# Altium PCB BOOSTController.PcbDoc
Units mm, origin at the board's own origin, x right, y up, seen from the top; angles counter-clockwise.
Board outline 82.81 x 63.42 mm, 2 copper layers (Top Layer, Bottom Layer); 18 components, 15 nets, 85 pads, 2 vias.
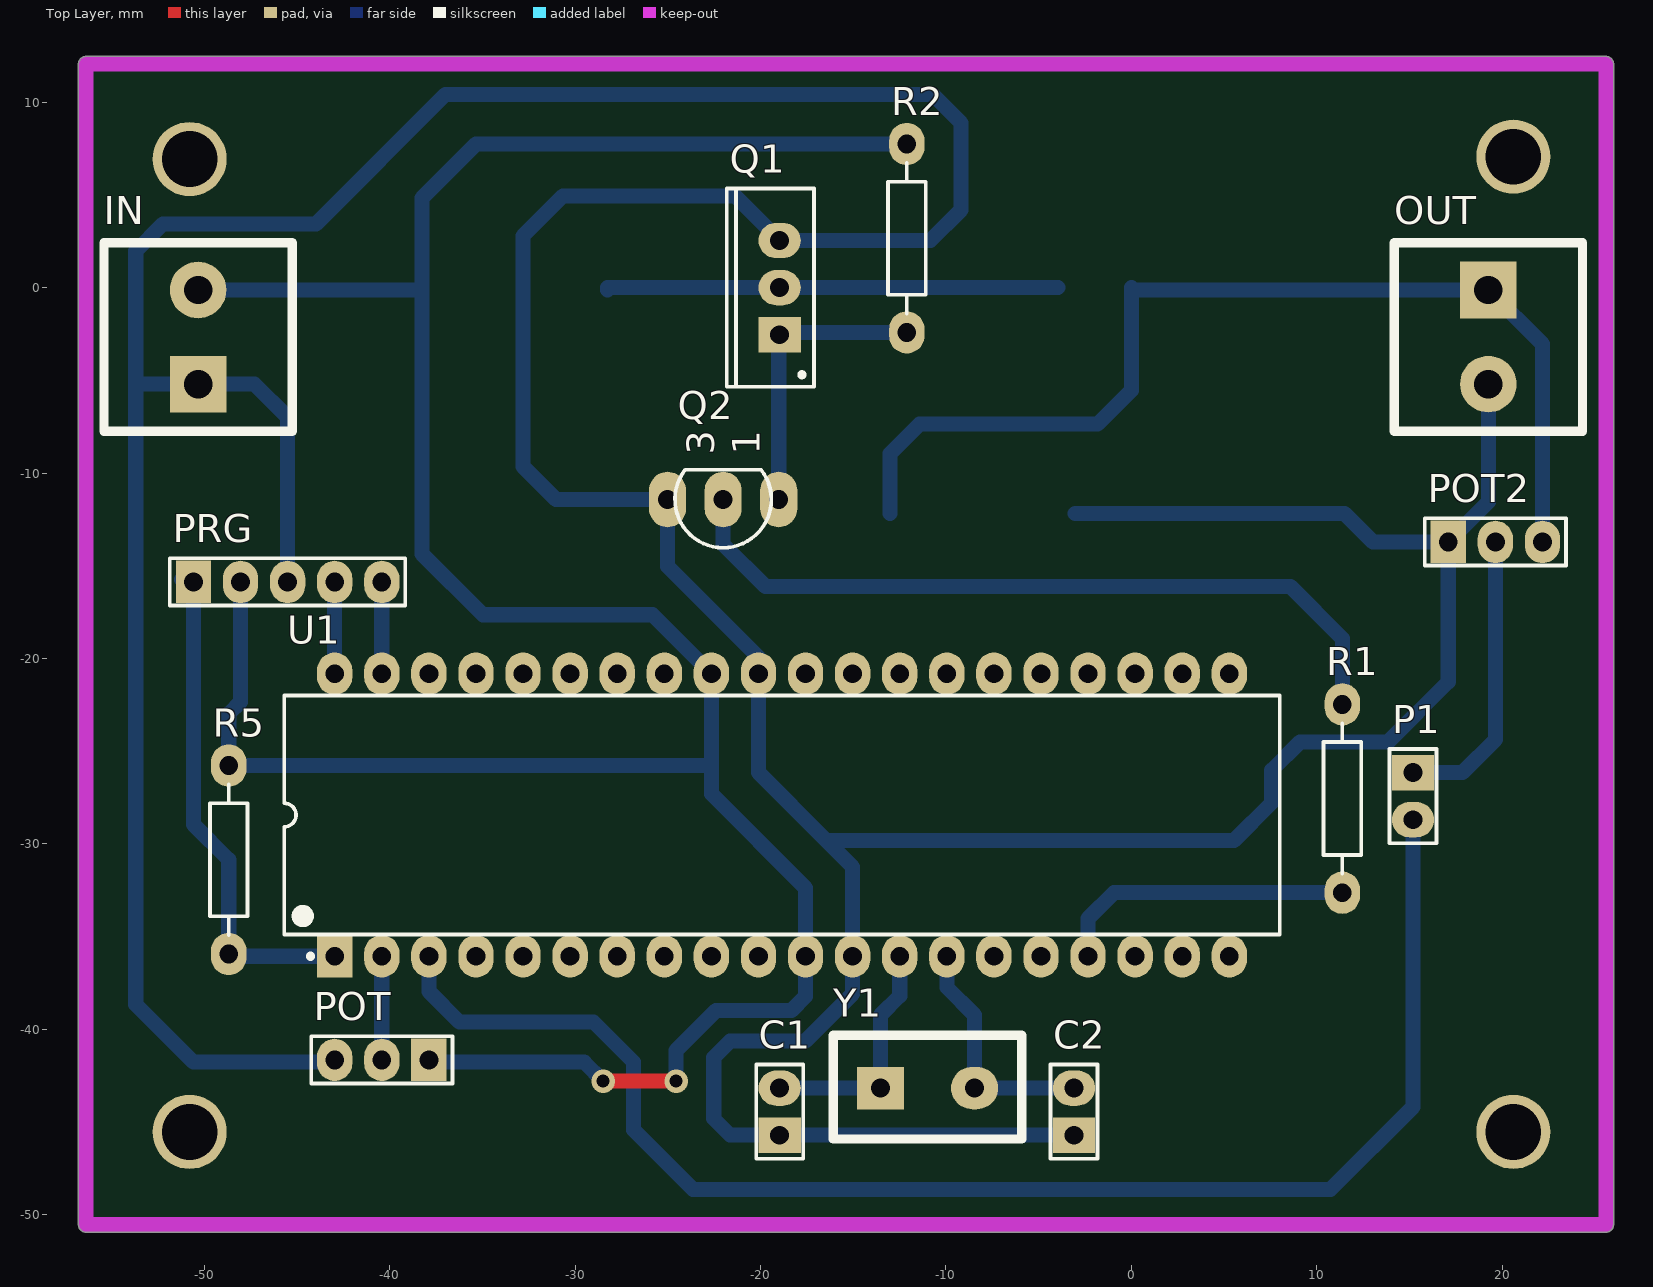
[diagram p0: Top Layer view]
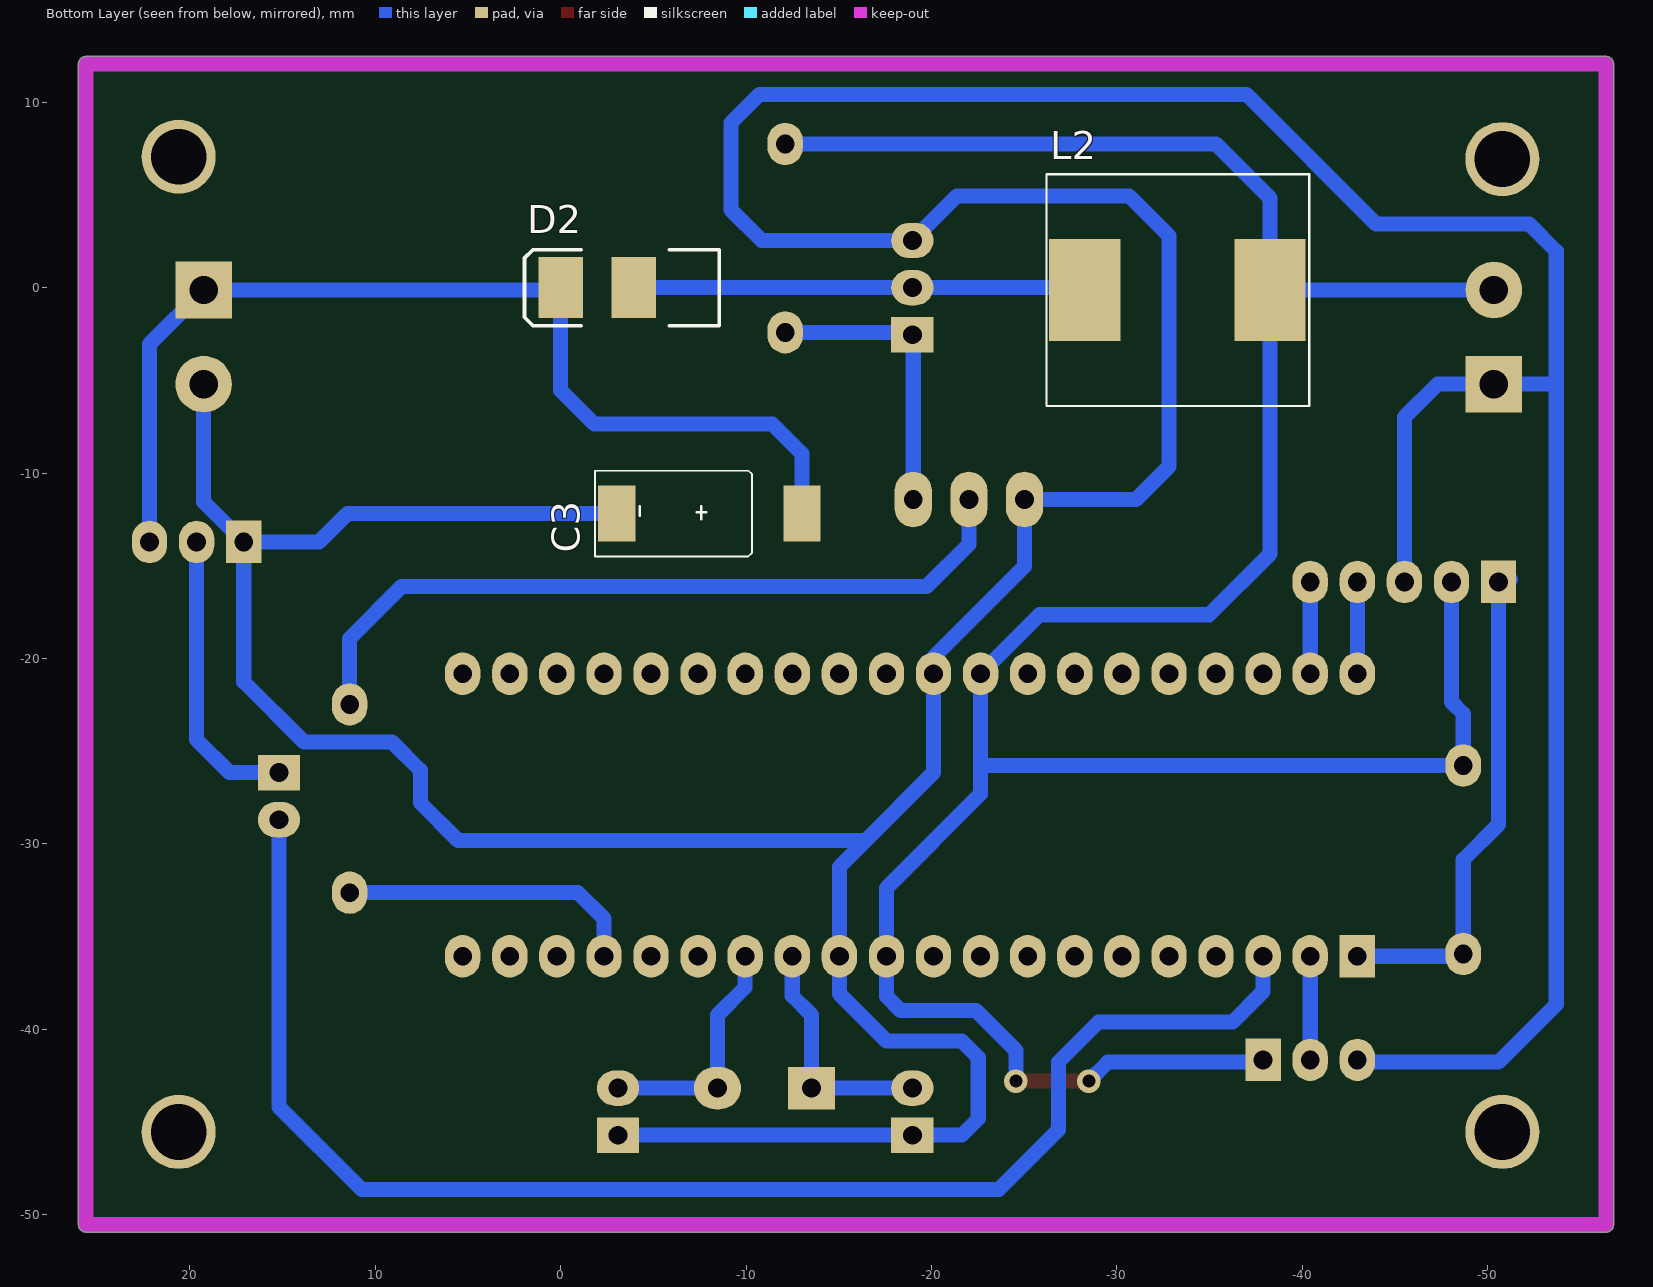
[diagram p1: Bottom Layer view, seen from below]

## Layer stack, top to bottom
Top Solder: solder mask 0.0102, Solder Resist, Dk 3.5
Top Layer: signal copper 0.0356
Dielectric 1: dielectric 0.32, FR-4, Dk 4.8
Bottom Layer: signal copper 0.0356
Bottom Solder: solder mask 0.0102, Solder Resist, Dk 3.5

## Board outline
-56.388,-50.953 cw(c-56.388,-50.546) -56.795,-50.546 -56.795,12.065 cw(c-56.388,12.065) -56.388,12.472 25.608,12.472 cw(c25.608,12.065) 26.015,12.065 26.015,-50.546 cw(c25.608,-50.546) 25.608,-50.953

## Design rules (kind name [scope] priority, off if disabled: settings)
Clearance [All] p1: gap=0.254
PolygonConnect [All] p1: connectstyle=Relief reliefconductorwidth=0.254 reliefentries=4 polygonreliefangle="90 Angle" airgapwidth=0.254
RoutingVias [All] p1: holewidth=0.711 width=1.27 viastyle="Through Hole" minholewidth=0.711 minwidth=1.27 maxholewidth=0.711 maxwidth=1.27
SolderMaskExpansion [All] p1: expansion=0.102
Width [All] p1: maxlimit=1.016 minlimit=0.813 preferedwidth=0.813 minimp=50.000000 maximp=50.000000 favimp=50.000000
30 further rules are at their usual default settings.

## Components (designator, comment, footprint, x,y, rotation, side; value= is the part's Value field where it differs from the comment)
C1 "Cap" RAD-0.1 -18.969,-44.45 r90 top
C2 "Cap" RAD-0.1 -3.094,-44.45 r90 top
C3 "" SMC7343P -6.015,-12.192 r0 bottom
D2 "SS34" SMC -3.475,0 r0 bottom
IN "Rosita2" Rosita2 -50.338,-2.667 r90 top
L2 "" L125 -33.261,-0.127 r0 bottom
OUT "Rosita2" Rosita2 19.258,-2.667 r270 top
P1 "Header 2" HDR1X2 15.194,-26.162 r270 top
POT "Header 3" HDR1X3 -37.892,-41.656 r180 top
POT2 "Header 3" HDR1X3 17.099,-13.716 r0 top
PRG "Header 5" HDR1X5 -50.592,-15.875 r0 top
Q1 "IRFZ44N" TO-220AB -18.969,0 r90 top
Q2 "BC546B" 29-04 -22.017,-11.43 r90 top
R1 "Res2" AXIAL-0.4 11.384,-27.559 r90 top
R2 "Res2" AXIAL-0.4 -12.111,2.667 r90 top
R5 "Res2" AXIAL-0.4 -48.687,-30.861 r90 top
U1 "PIC16F877A-I/P" PDIP600-P40 -18.842,-28.448 r90 top
Y1 "XTAL" CrystalClock -10.968,-43.18 r0 top

## Footprints (in the part's own frame and the unit in brackets; to place one, negate y for a bottom-side part, rotate by r counter-clockwise, add the part's x,y. Pads: shape width x height; smd on the part's side, far side on the other; paste and mask are expansions set on the pad)
29-04 [mm] "TO, Flat Index; 3 In-Line, Axial Leads; Body Dia. 4.8mm; Leads 0.48 x 0.5 mm (max)"
  oval 3x2 hole 1.016: 1(0,-3) 2(0,0) 3(0,3)
  silkscreen extent -2.6,-2.6 1.6,2.6
AXIAL-0.4 [mil] "Axial Device, Thru-Hole; 2 Leads; 0.4 in Pin Spacing"
  oval 90x75 hole 40: 1(-200,0) 2(200,0)
  silkscreen extent -160,-40 160,40
CrystalClock [mil]
  rect 100x90 hole 40: 1(-101,0)
  oval 100x90 hole 40: 2(99,0)
  silkscreen extent -201,-108 199,112
HDR1X2 [mil] "Connector; Header; 2 Position"
  rect 75x90 hole 40: 1(0,0)
  oval 75x90 hole 40: 2(100,0)
  silkscreen extent -50,-50 150,50
HDR1X3 [mil] "Connector; Header; 3 Position"
  rect 75x90 hole 40: 1(0,0)
  oval 75x90 hole 40: 2(100,0) 3(200,0)
  silkscreen extent -50,-50 250,50
HDR1X5 [mil] "Connector; Header; 5 Position"
  rect 75x90 hole 40: 1(0,0)
  oval 75x90 hole 40: 2(100,0) 3(200,0) 4(300,0) 5(400,0)
  silkscreen extent -50,-50 450,50
L125 [mm]
  rect 3.85x5.5 smd: 1(-5,0.01) 2(5,0.01)
  silkscreen extent -7.12,-6.24 7.05,6.26
PDIP600-P40 [mil] "DIP, 40-Leads, Row Spacing 15.24mm, Pitch 2.54mm, Body 51.8x13.5mm"
  rect 90x75 hole 40: 1(-300,950)
  oval 90x75 hole 40: 2(-300,850) 3(-300,750) 4(-300,650) 5(-300,550) 6(-300,450) 7(-300,350) 8(-300,250) 9(-300,150) 10(-300,50) 11(-300,-50) 12(-300,-150) 13(-300,-250) 14(-300,-350) 15(-300,-450) 16(-300,-550) 17(-300,-650) 18(-300,-750) 19(-300,-850) 20(-300,-950) 21(300,-950) 22(300,-850) 23(300,-750) 24(300,-650) 25(300,-550) 26(300,-450) 27(300,-350) 28(300,-250) 29(300,-150) 30(300,-50) 31(300,50) 32(300,150) 33(300,250) 34(300,350) 35(300,450) 36(300,550) 37(300,650) 38(300,750) 39(300,850) 40(300,950)
  silkscreen extent -305,-1057 254,1057, body extent -287,-1057 287,1057, height 250
RAD-0.1 [mil] "Radial Cap, Thru-Hole; 2 Leads; 0.1 in Pin Spacing"
  rect 75x90 hole 40: 1(-50,0)
  oval 75x90 hole 40: 2(50,0)
  silkscreen extent -100,-50 100,50
Rosita2 [mil]
  rect 120x120 hole 60: 1(-100,0)
  round 120 hole 60: 2(100,0)
  silkscreen extent -200,-200 200,200
SMC [mm] "DO-214-AB/SMC; 2 C-Bend Leads; Body 7.9 x 5.9 mm, inc. leads (LxW)"
  rect 2.4x3.3 smd: 1(-0.475,0) 2(3.475,0)
  silkscreen extent -5.08,-2.05 5.42,2.06
SMC7343P [mm]
  rect 2x3 smd: 1(-7.007,-0.005) 2(2.993,-0.005)
  silkscreen extent -4.31,-2.31 4.17,2.31
TO-220AB [mil] "TO, Thru-Hole, Vertical, Heatsink Mounted; 3 In-Line Leads; Pitch 2.54 mm"
  rect 75x90 hole 40: 1(-100,0)
  oval 75x90 hole 40: 2(0,0) 3(100,0)
  silkscreen extent -211,-73 211,112, body extent -213,-75 213,114, height 760

## Part data
C1 C2: "Capacitor"
C3: library part Cap2, "Capacitor"
D2: library part "D Zener", "Schottky Diode [SS34]"
L2: library part Inductor, "Inductor"
P1: "Header, 2-Pin"
POT POT2: "Header, 3-Pin"
PRG: "Header, 5-Pin"
Q1: "HEXFET Power MOSFET"
Q2: "Amplifier Transistor NPN Silicon"
R1 R2 R5: "Resistor"
U1: "Enhanced FLASH Microcontroller, 8K (x14-Bit words) FLASH, 368 Bytes RAM, 40-Pin PDIP, Standard VDD Range, Industrial Temperature"
Y1: "Crystal Oscillator"

## Free pads (board coordinates)
  round 4 hole 3: 2(-50.799,-45.546) 2(-50.799,6.938) 2(20.608,-45.546) 2(20.608,7.065)

## Via types
v1: diameter 1.27, hole 0.711, Top Layer to Bottom Layer, 2 vias

## Nets (pads, with @x,y where several pads share a name; then routed paths per layer and width w, separated by ;. In a path a pad name is that pad's centre, name@x,y a point inside that pad or via, vN(x,y) a via of type N, cw(c..) or ccw(c..) an arc to the next point about the centre after c; other vN are vias at no path point)
FEEDBACK: P1.2 U1.3 | length 78.9
  Bottom Layer w0.813: U1.3 -37.892,-37.973 -36.241,-39.624 -29.002,-39.624 -26.843,-41.783 -26.843,-45.441 -23.643,-48.641 10.749,-48.641 15.194,-44.196 P1.2
GND: C1.1 C2.1 C3.2 IN.1 OUT.2 POT2.1 POT.3 PRG.3 Q1.3 Q2.3 U1.12 U1.31 | length 309.8
  Bottom Layer w0.813: PRG.3 -45.512,-6.985 -47.29,-5.207 IN.1 -53.577,-5.207 -53.704,-5.08 ; POT.3@-42.845,-41.783 -50.592,-41.783 -53.704,-38.671 -53.704,-5.08 ; C2.1 C1.1 -21.636,-45.72 -22.525,-44.831 -22.525,-41.529 -21.636,-40.64 -17.572,-40.64 -15.032,-38.1 U1.12 -15.032,-31.242 -16.454,-29.82 ; C3.2 11.505,-12.187 13.035,-13.716 POT2.1 ; OUT.2 19.258,-11.557 POT2.1 ; -53.704,-5.08 -53.704,1.968 -52.243,3.429 -43.988,3.429 -37.003,10.414 -10.714,10.414 -9.19,8.89 -9.19,4.191 -10.841,2.54 Q1.3 -21.382,4.953 -30.653,4.953 -32.812,2.794 -32.812,-9.652 -31.034,-11.43 Q2.3 -25.017,-15.034 -20.112,-19.939 U1.31 -20.112,-26.162 -16.454,-29.82 ; -16.454,-29.82 5.542,-29.82 7.574,-27.788 7.574,-26.035 9.098,-24.511 13.848,-24.511 17.099,-21.26 POT2.1
MCLR: PRG.1 R5.1 U1.1 | length 27.5
  Bottom Layer w0.813: PRG.1@-51.227,-15.748 PRG.1@-50.592,-16.383 ; PRG.1 PRG.1@-50.592,-16.383 ; U1.1 -48.56,-36.068 R5.1 -48.687,-30.861 -50.592,-28.956 PRG.1@-50.592,-16.383
NetC3_1: C3.1 D2.2 OUT.1 POT2.3 | length 57.3
  Bottom Layer w0.813: C3.1 -13.022,-8.958 -11.43,-7.366 -1.824,-7.366 0,-5.542 D2.2@0,-0.127 ; D2.2 D2.2@0,-0.127 ; POT2.3 22.179,-3.048 OUT.1 D2.2@0,-0.127
NetD2_1: D2.1 L2.2 Q1.2 | length 24.4
  Bottom Layer w0.813: L2.2 -28.261,0 Q1.2 D2.1
NetP1_1: P1.1 POT2.2 | length 15.8
  Bottom Layer w0.813: P1.1 17.861,-26.162 19.639,-24.384 POT2.2
NetQ1_1: Q1.1 Q2.1 R2.1 | length 15.8
  Bottom Layer w0.813: Q2.1 -19.017,-2.588 Q1.1 -18.842,-2.413 R2.1
NetQ2_2: Q2.2 R1.2 | length 41.5
  Bottom Layer w0.813: Q2.2 -22.017,-13.843 -19.731,-16.129 8.59,-16.129 11.384,-18.923 R1.2
OSC0: C1.2 U1.13 Y1.1 | length 13
  Bottom Layer w0.813: C1.2 Y1.1 -13.533,-39.243 -12.492,-38.202 U1.13
OSC1: C2.2 U1.14 Y1.2 | length 13.1
  Bottom Layer w0.813: U1.14 -9.952,-37.744 -8.453,-39.243 Y1.2 C2.2
PGC: PRG.5 U1.39 | length 5
  Bottom Layer w0.813: U1.39 PRG.5
PGD: PRG.4 U1.40 | length 5
  Bottom Layer w0.813: U1.40 PRG.4
PWM: R1.1 U1.17 | length 16.3
  Bottom Layer w0.813: U1.17 -2.332,-34.036 -0.935,-32.639 R1.1
SIGNAL: POT.2 U1.2 | length 5.6
  Bottom Layer w0.813: POT.2 U1.2
VCC: IN.2 L2.1 POT.1 PRG.2 R2.2 R5.2 U1.11 U1.32 | length 156.7
  Top Layer w0.813: v1(-28.494,-42.799) v1(-24.557,-42.799)
  Bottom Layer w0.813: IN.2 -44.318,-0.127 -44.308,-0.137 L2.1 ; PRG.2 -48.052,-22.352 -48.687,-22.987 R5.2 -22.652,-25.781 ; POT.1@-38.4,-41.783 -29.51,-41.783 v1(-28.494,-42.799) ; v1(-24.557,-42.799) -24.557,-41.148 -22.398,-38.989 -18.334,-38.989 -17.572,-38.227 U1.11 -17.572,-32.385 -22.652,-27.305 -22.652,-25.781 ; R2.2 -35.352,7.747 -38.261,4.838 L2.1 ; L2.1 -38.261,-14.363 -34.978,-17.646 -25.834,-17.646 U1.32 -22.652,-25.781
pads on no net: U1.4 U1.5 U1.6 U1.7 U1.8 U1.9 U1.10 U1.15 U1.16 U1.18 U1.19 U1.20 U1.21 U1.22 U1.23 U1.24 U1.25 U1.26 U1.27 U1.28 U1.29 U1.30 U1.33 U1.34 U1.35 U1.36 U1.37 U1.38

## Keep-outs
Keep-Out Layer:
  lines w0.813: -56.388,-50.546 25.608,-50.546 25.608,12.065 -56.388,12.065 -56.388,-50.546

## Text inside footprints (layer, text, board x,y; h text height)
Q2: Top Overlay "3" at -22.484,-9.009 h1.5 r90; Top Overlay "1" at -20.038,-9.009 h1.5 r90